# Altium PCB CSP - potentiometers_c.PcbDoc
Units mil, origin at the board's own origin, x right, y up, seen from the top; angles counter-clockwise.
Board outline 1390 x 2400 mil, 2 copper layers (Top Layer, Bottom Layer); 38 components, 21 nets, 80 pads, 0 vias.
Unrouted connection lines stored in the file: 11.
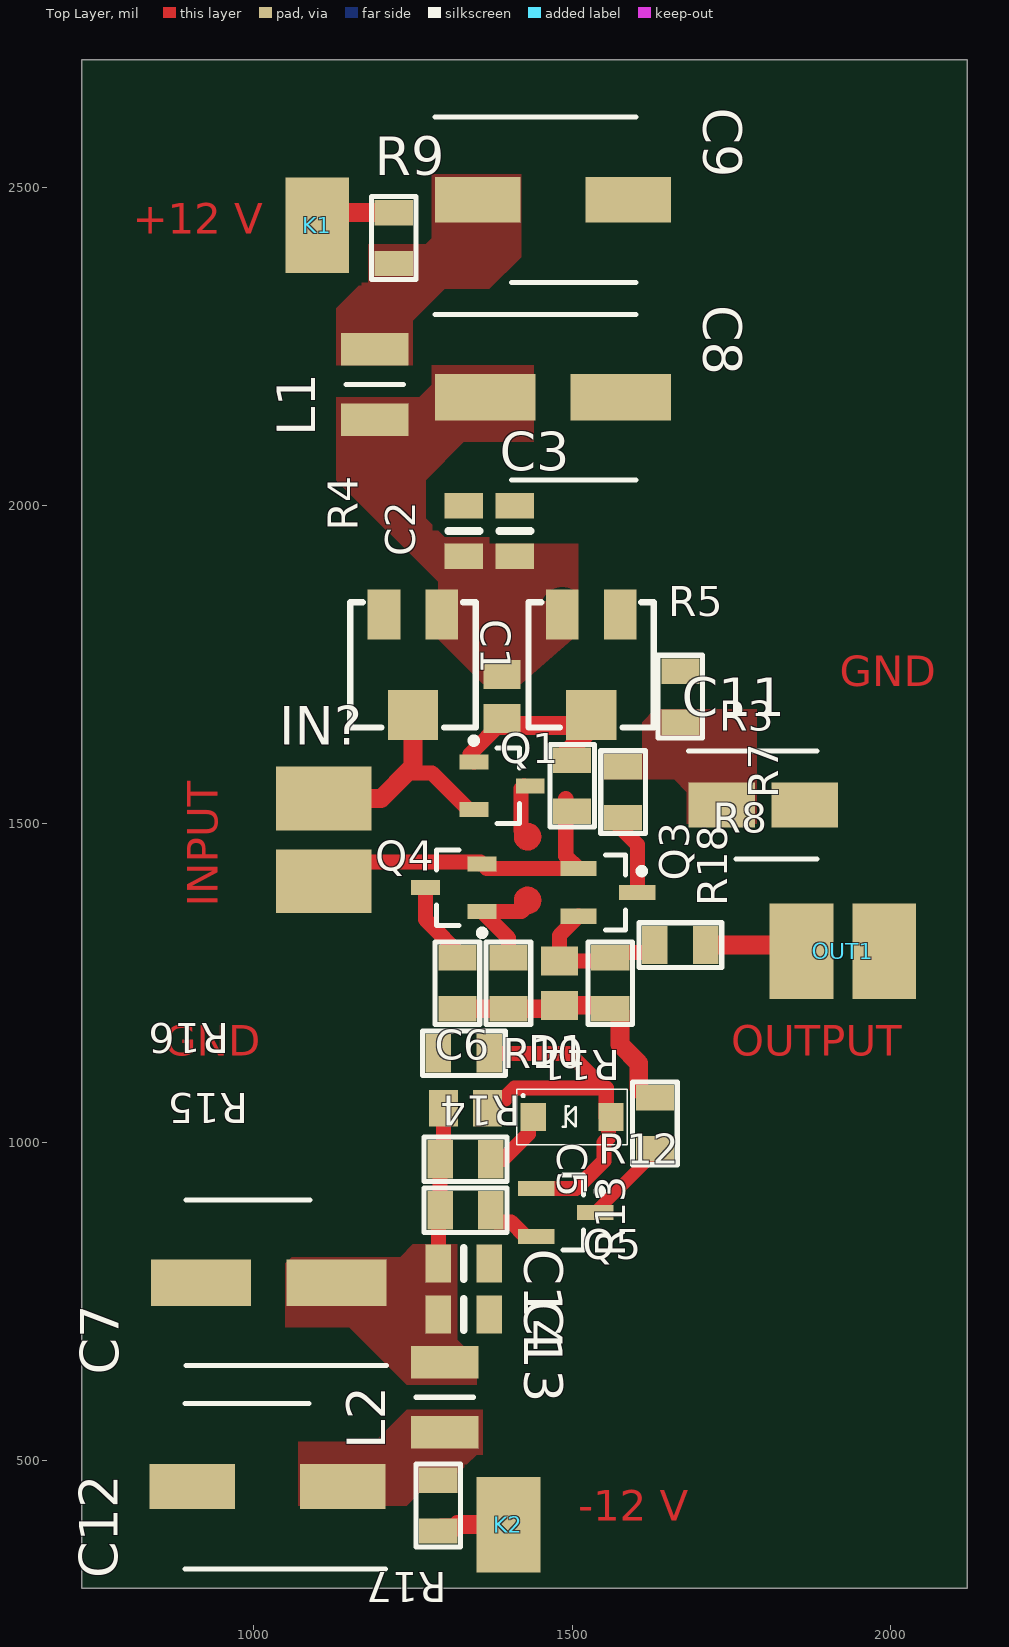
[diagram p0: Top Layer view]
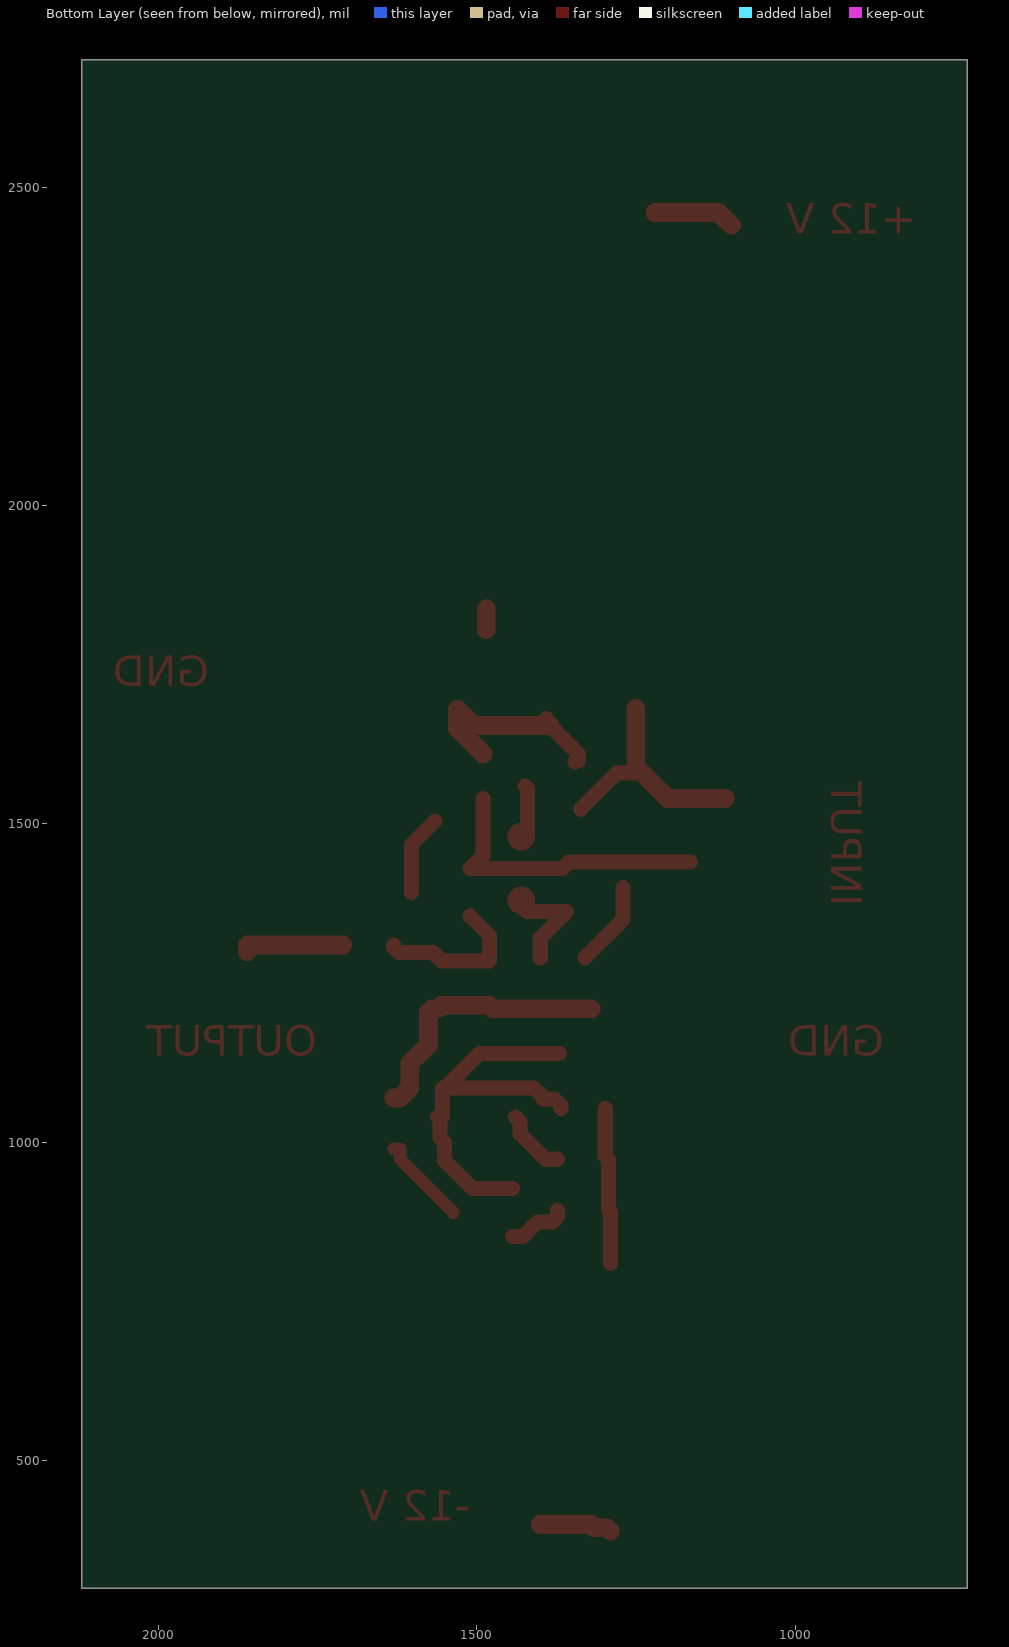
[diagram p1: Bottom Layer view, seen from below]
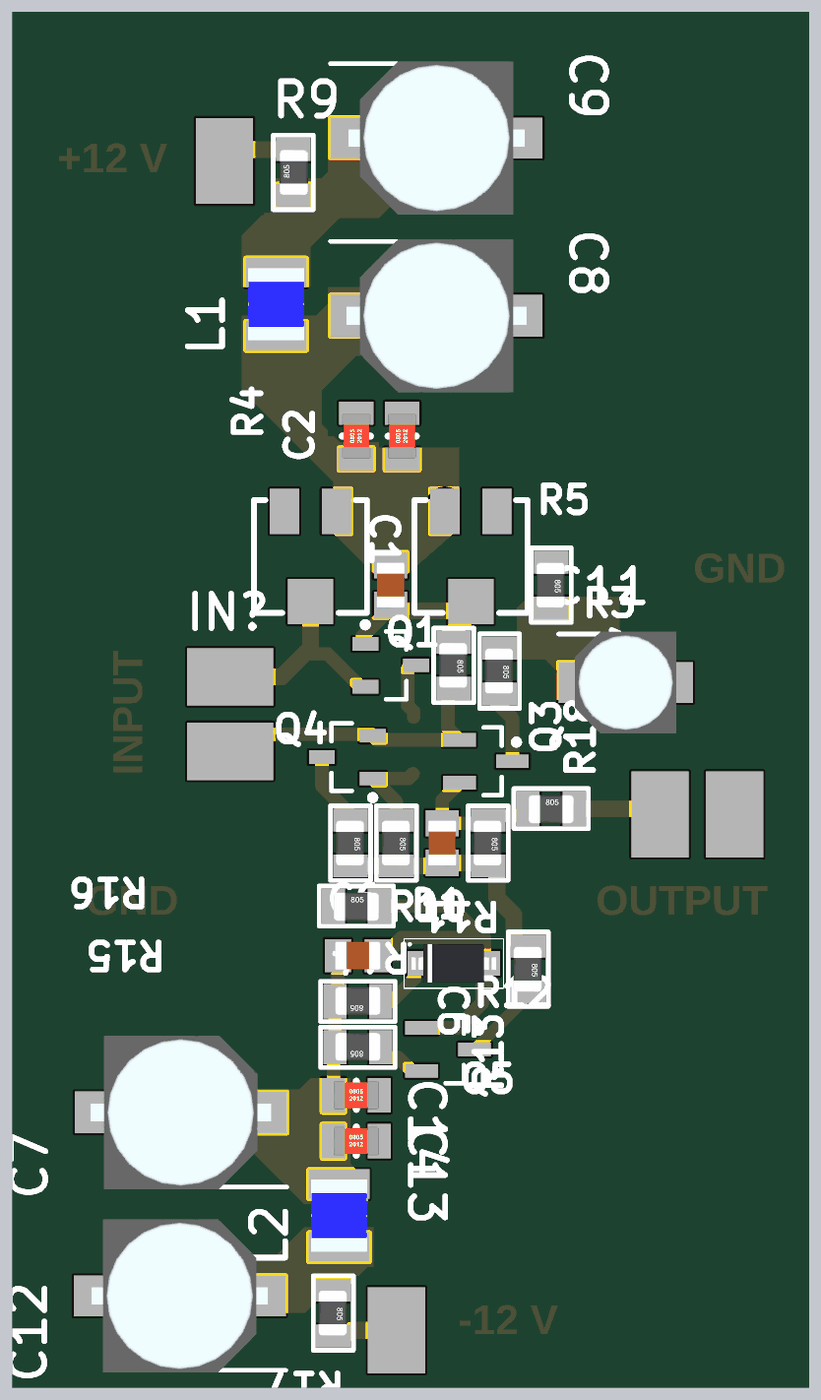
[diagram p2: 3D render of the assembled board from above, using the file's embedded part models]

## Layer stack, top to bottom
Top Solder: solder mask 0.4, Solder Resist, Dk 3.5
Top Layer: signal copper 1.4
Dielectric 1: dielectric 12.6, FR-4, Dk 4.8
Bottom Layer: signal copper 1.4
Bottom Solder: solder mask 0.4, Solder Resist, Dk 3.5

## Board outline
730,300 2120,300 2120,2700 730,2700

## Design rules (kind name [scope] priority, off if disabled: settings)
Clearance [All] p1: gap=10 ignorepadtopadclearanceinfootprint=FALSE except(0: Arc-Hole Track-Hole SMDPad-Hole THPad-Hole Via-Hole Fill-Hole Poly-Text Poly-Hole Region-Hole Text-Hole; 11.81: Arc-Arc Arc-Track Arc-SMDPad Arc-THPad Arc-Via Arc-Fill Arc-Poly Arc-Region Arc-Text Track-Track Track-SMDPad Track-THPad Track-Via Track-Fill Track-Region Track-Text; 19.68: Track-Poly SMDPad-Poly)
PlaneConnect [All] p1: planeconnectstyle=Direct reliefexpansion=20 reliefentries=4 reliefconductorwidth=10 reliefairgap=10
PolygonConnect [All] p1: connectstyle=Direct reliefconductorwidth=10 reliefentries=4 polygonreliefangle="90 Angle" airgapwidth=10
RoutingVias [All] p1: holewidth=28 width=50 viastyle="Through Hole" minholewidth=28 minwidth=50 maxholewidth=28 maxwidth=50
SolderMaskExpansion [All] p1: expansion=4 istentingtop=FALSE
Width [All] p1: maxlimit=200 minlimit=10 preferedwidth=23.62 bottomlayer_maxwidth=10 bottomlayer_prefwidth=10 minimp=50.000000 maximp=50.000000 favimp=50.000000
29 further rules are at their usual default settings.

## Components (designator, comment, footprint, x,y, rotation, side; value= is the part's Value field where it differs from the comment)
C1 "Cap" *CAPC2012X94N 1390,1700 r90 top value=1uF
C2 "Cap" SMD-0805C 1330,1960 r0 top value=0.1uF
C3 "Cap" SMD-0805C 1410,1960 r0 top value=0.01uF
C5 "Cap" *CAPC2012X94N 1480,1250 r90 top value=1uF
C6 "Cap" *CAPC2012X94N 1332.6,1053.62 r0 top value=0.01uF
C7 "#NAME?" CAPAE660X550N 1023.7,780 r180 top value=22uF
C8 "#NAME?" CAPAE660X550N 1470,2170 r0 top value=22uF
C9 "#NAME?" CAPAE660X800N 1470,2480 r0 top value=100uF
C11 "#NAME?" CAPAE430X550N 1800,1530 r0 top value=1uF
C12 "#NAME?" CAPAE660X800N 1021.89,460 r180 top value=100uF
C13 "Cap" SMD-0805C 1330,730 r270 top value=0.1uF
C14 "Cap" SMD-0805C 1330,810 r270 top value=0.01uF
D1 "Diode" SODFL350X110-2N 1500,1040 r0 top
IN? "INPUT" IN/OUT 1110,1540 r0 top
K1 "+12V" PAD 1100,2440 r90 top
K2 "-12V" PAD 1400,400 r90 top
L1 "390uH" INDC3225X270N 1190,2190 r90 top
L2 "390uH" INDC3225X270N 1300,600 r90 top
OUT1 "OUTPUT" IN/OUT 1860,1300 r90 top
Q1 "2N3906 PNP" SOT-23B_N 1390,1560 r0 top
Q3 "2N3904 NPN" SOT23_M 1556.26,1392.6 r0 top
Q4 "2N3906 PNP" SOT-23B_N 1314.29,1400 r180 top
Q5 "2N3904 NPN" SOT23_M 1490,890 r0 top
R3 "Res1" SMD-0805-RES 1670,1700 r180 top value=33
R4 "RPot SM" POT4MM-2 1250,1750 r270 top
R5 "RPot SM" POT4MM-2 1530,1750 r270 top
R7 "Res1" SMD-0805-RES 1500,1560 r180 top value=3K
R8 "Res1" SMD-0805-RES 1580,1550 r180 top value=33
R9 "Res1" SMD-0805-RES 1220,2420 r0 top value=100
R10 "Res1" SMD-0805-RES 1400,1250 r180 top value=15k
R11 "Res1" SMD-0805-RES 1560,1250 r180 top value=500
R12 "Res1" SMD-0805-RES 1320,1250 r180 top value=33
R13 "Res1" SMD-0805-RES 1630,1030 r180 top value=33
R14 "Res1" SMD-0805-RES 1330,1140 r270 top value=10K
R15 "Res1" SMD-0805-RES 1332.6,893.62 r90 top value=100
R16 "Res1" SMD-0805-RES 1332.6,973.62 r90 top value=1.4k
R17 "100" SMD-0805-RES 1290,430 r180 top
R18 "Res1" SMD-0805-RES 1670,1310 r270 top value=51

## Footprints (in the part's own frame and the unit in brackets; to place one, negate y for a bottom-side part, rotate by r counter-clockwise, add the part's x,y. Pads: shape width x height; smd on the part's side, far side on the other; paste and mask are expansions set on the pad)
*CAPC2012X94N [mm]
  rect 1.16x1.47 smd: 1(-0.88,0) 2(0.88,0)
  body extent -1,-0.62 1.01,0.63, height 0.94
CAPAE430X550N [mm]
  rect 2.65x1.8 smd: 1(-1.65,0) 2(1.65,0)
  silkscreen extent -2.98,-2.15 2.15,2.15, body extent -2.25,-2.25 2.25,2.25, height 5.5
CAPAE660X550N [mm]
  rect 4x1.85 smd: 1(-2.7,0) 2(2.7,0)
  silkscreen extent -4.7,-3.3 3.3,3.3, body extent -4,-3.4 4,3.4, height 5.5
CAPAE660X800N [mm]
  rect 3.4x1.8 smd: 1(-3,0) 2(3,0)
  silkscreen extent -4.7,-3.3 3.3,3.3, body extent -3.9,-3.4 3.9,3.4, height 8
IN/OUT [mil]
  rect 150x100 smd: 1(0,0) 2(0,-130)
INDC3225X270N [mm]
  rect 1.3x2.7 smd: 1(-1.4,0) 2(1.4,0)
  silkscreen extent 0,-1.15 0,1.15, body extent -1.6,-1.25 1.6,1.25, height 2.7
PAD [mil]
  rect 150x100 smd: 1(0,0)
POT4MM-2 [mm] "Square Trimming Potentiometer"
  rect 2x1.3 smd: CCW(-2,-1.15) CW(-2,1.15)
  rect 2x2 smd: W(2,0)
  silkscreen extent -2.5,-2.5 2.5,2.5
SMD-0805-RES [mil]
  rect 60x40 smd: 1(0,40) 2(0,-40)
  silkscreen extent -35,-65 35,65, body extent -24,-39 26,39, height 31
SMD-0805C [mil]
  rect 60x40 smd: 1(0,40) 2(0,-40)
  silkscreen extent -25,0 25,0, body extent -25,-39 25,39, height 35
SODFL350X110-2N [mm] "SODFL, 2-Leads, Body 1.70x3.50mm, IPC Medium Density"
  rect 1x1.1 smd: A(1.55,0) C(-1.55,0)
  silkscreen extent -2.2,-1.1 2.2,1.1, body extent -1.87,-0.85 1.88,0.85, height 1.2
SOT23_M [mm] "SOT23, 3-Leads, Body 2.9x1.3mm, Pitch 0.95mm, Lead Span 2.3mm - Reverse Pinning, IPC Low Density"
  rect 1.45x0.6 smd: 1(1.175,0) 2(-1.175,-0.95) 3(-1.175,0.95)
  silkscreen extent -0.1,-1.5 1.48,1.5, body extent -0.7,-1.5 0.7,1.5, height 1.1
SOT-23B_N [mm] "SOT23, 3-Leads, Body 2.9x1.3mm, Pitch 0.95mm, Lead Span 2.4mm, IPC Medium Density"
  rect 1.15x0.6 smd: 1(-1.125,0.95) 2(-1.125,-0.95) 3(1.125,0)
  silkscreen extent -1.25,-1.5 0.7,1.92, body extent -0.7,-1.5 0.7,1.5, height 1.14

## Part data
C1 C2 C3 C5 C6 C13 C14: "Capacitor", LatestRevisionDate=17-Jul-2002, LatestRevisionNote="Re-released for DXP Platform.", PackageDescription="Radial Cap, Thru-Hole; 2 Leads; 0.3 in Pin Spacing", PackageReference=RAD-0.3, Published=8-Jun-2000, Publisher="Altium Limited"
C7 C8: library part TYEH1V226F55MTR, "22uF 35V, Capacitor Polarised", Voltage=35V, Dimension=6.3x5.3mm, Part number=TYEH1V226F55MTR
C9 C12: library part EEEFK1E101P, "100uF 25V, cap polarised", Voltage=25V, Dimensions=8x6.2mm, Part number=EEEFK1E101P
C11: library part UWT1H010MCL1GB, "1uF 50V, Capacitor Polarised", Manufacturer_Name=Nichicon, Voltage=50V, Dimensions=4x5.4mm, Part number=UWT1H010MCL1GB
L1 L2: library part NLV10JT391, "390uH, Inductor", Package=1210, Resistance=36
Q1 Q4: library part PNP, "PNP Bipolar Transistor", LatestRevisionDate=29-May-2009, LatestRevisionNote="IPC-7351 Footprint Added.", PackageDescription="3-Pin SOT-23 Package 0.95 mm Pitch, 2.4 mm Lead Span", PackageReference=SOT-23B, PackageVersion=Aug-1999, Published=8-Jun-2000, Publisher="Altium Limited"
Q3 Q5: library part NPN, "NPN Bipolar Transistor", Code_JEDEC=TO-226-AA, LatestRevisionDate=17-Jul-2002, LatestRevisionNote="Re-released for DXP Platform.", PackageDescription="TO, Flat Index; 3 In-Line, Axial Leads; Body Dia. 4.8mm; Leads 0.55 x 0.51 mm (max)", PackageReference=TO-226-AA, Published=8-Jun-2000, Publisher="Altium Limited"
R3 R7 R8 R9 R10 R11 R12 R13 R14 R15 R16 R18: "Resistor", LatestRevisionDate=17-Jul-2002, LatestRevisionNote="Re-released for DXP Platform.", PackageDescription="Axial Device, Thru-Hole; 2 Leads; 0.3 in Pin Spacing", PackageReference=AXIAL-0.3, Published=8-Jun-2000, Publisher="Altium Limited"
R4 R5: "Square Trimming Potentiometer", ComponentLink1Description="Manufacturer Link", ComponentLink1URL=http://bourns.com/2/search.html, DatasheetVersion=Oct-2003, PackageDescription="Square Trimming Potentiometer", PackageReference=POT4MM-2, Published=17-Dec-2003, Publisher="Altium Limited"
R17: library part Res1, "Resistor", LatestRevisionDate=17-Jul-2002, LatestRevisionNote="Re-released for DXP Platform.", PackageDescription="Axial Device, Thru-Hole; 2 Leads; 0.3 in Pin Spacing", PackageReference=AXIAL-0.3, Published=8-Jun-2000, Publisher="Altium Limited"

## Nets (pads, with @x,y where several pads share a name; then routed paths per layer and width w, separated by ;. In a path a pad name is that pad's centre, name@x,y a point inside that pad or via, vN(x,y) a via of type N, cw(c..) or ccw(c..) an arc to the next point about the centre after c; other vN are vias at no path point)
GND: C2.1 C3.1 C7.2 C8.2 C9.2 C11.2 C12.2 C13.1 C14.1 R14.2
NetC1_1: C1.1 Q1.1 R5.W R7.2 | length 334.9
  Top Layer w23.62: Q1.1 1343.11,1600 1340,1600 1340,1610 1390,1660 C1.1
  Top Layer w29.53: C1.1@1384.88,1654.88 1504.88,1654.88 1530,1680 1530,1650 R7.2@1490,1610
NetC1_2: C1.2 C2.2 C3.2 C8.1 L1.1 R3.2 R4.CW R5.CCW | length 32.2
  Top Layer w29.53: R5.CCW@1484.72,1805.28 R5.CCW@1484.72,1837.48
NetC5_1: C5.1 R10.1 R11.1 R12.1 R13.2 | length 417.6
  Top Layer w23.62: C5.1@1474.65,1210 C5.1
  Top Layer w29.53: R12.1 R10.1 C5.1@1474.65,1210 ; C5.1 R11.1@1554.65,1215.35 ; R11.1 1570,1210 1575.24,1204.76 1575.24,1153.82 1604.76,1124.29 1604.76,1085.24 1620,1070 R13.2
NetC5_2: C5.2 Q3.2 R11.2 R18.2 | length 245.6
  Top Layer w23.62: Q3.2 1480,1325.2 C5.2 1554.65,1284.65 1568.19,1298.19 1621.81,1298.19 1630,1306.38 R18.2
NetC6_1: C6.1 C7.1 C13.2 C14.2 L2.2 R15.1 R16.1 | length 246.9
  Top Layer w23.62: C14.2 1290,891.02 R15.1 R16.1 1297.95,978.98 C6.1
NetC6_2: C6.2 D1.A Q5.3 R14.1 | length 661.7
  Top Layer w23.62: C6.2 1367.24,1057.48 1378.27,1068.5 1395.67,1068.5 1395.67,1071.44 1409.51,1085.28 1553.62,1085.28 1553.62,1040 D1.A 1557.4,1036.38 1557.4,1007.4 1550,1000 1550,971.24 1506.16,927.4 Q5.3 ; R14.1 1495.18,1140 1553.62,1081.56
NetC9_1: C9.1 L1.2 R9.2
NetC11_1: C11.1 R3.1 R8.2
NetC12_1: C12.1 L2.1 R17.2
NetD1_C: D1.C R16.2 | length 105
  Top Layer w23.62: R16.2 1391.57,973.62 1431.57,1013.62 1431.57,1032.6 D1.C
NetIN?_1: IN?.1 Q1.2 R4.W | length 377.8
  Top Layer w23.62: 1245,1585 1250,1580 1268.31,1580 ; 1260,1580 1280,1580 1335.71,1524.29 Q1.2@1335.71,1522.6
  Top Layer w29.53: IN?.1 1200,1540 1245,1585 1250,1590 R4.W R4.W@1250,1681.26
NetIN?_2: IN?.2 Q3.3 Q4.2 R7.1 | length 468.6
  Top Layer w23.62: IN?.2@1163.78,1440 1355.98,1440 Q4.2 1365.98,1430 Q3.3 1490,1450 1490,1540
NetK1_1: K1.1 R9.1 | length 128.3
  Top Layer w29.53: K1.1 1120,2460 R9.1
NetK2_1: K2.1 R17.1 | length 114.1
  Top Layer w29.53: R17.1 1295.24,395.24 1315.71,395.24 1320.47,400 K2.1
NetOUT1_1: OUT1.1 R18.1 | length 160
  Top Layer w29.53: R18.1 1860,1310 OUT1.1
NetQ1_3: Q1.3 Q4.1 R10.2 | length 408.1
  Top Layer w19.68: 1441.81,1380 ccw(c1430,1380) 1441.81,1380 ; 1441.81,1480 ccw(c1430,1480) 1441.81,1480
  Top Layer w23.62: R10.2 1400,1321.18 Q4.1 1420.73,1362.6 1429.08,1370.95 ; Q1.3@1424.29,1560 1420,1555.71 1420,1490 1421.65,1488.35 1430,1480 1430,1470
NetQ3_1: Q3.1 R8.1 | length 127.9
  Top Layer w23.62: R8.1@1565,1505 1602.52,1467.48 Q3.1
NetQ4_3: Q4.3 R12.2 | length 134.9
  Top Layer w23.62: Q4.3 1270,1350 R12.2@1330,1290
NetQ5_1: Q5.1 R13.1 | length 144.7
  Top Layer w19.68: Q5.1 1620,973.74 1620,990 R13.1
NetQ5_2: Q5.2 R15.2 | length 94
  Top Layer w23.62: R15.2 1372.6,883.62 1380.79,875.43 1404.17,875.43 1427.01,852.6 Q5.2
pads on no net: OUT1.2 R4.CCW R5.CW

## Polygon pours and split planes (outlines as drawn)
NetC9_1 on Top Layer "NETC9_1_L01_P039" (solid, pour order 39): 1130,2220 1130,2310 1170,2350 1180,2350 1180,2410 1270,2410 1280,2420 1280,2520 1420,2520 1420,2390 1370,2340 1300,2340 1250,2290 1250,2220
NetC1_2 on Top Layer "NETC1_2_L01_P038" (solid, pour order 38): 1440,2220 1280,2220 1280,2190 1260,2170 1130,2170 1130,2040 1290,1880 1370,1880 1370,1950 1300,1950 1270,1980 1270,2040 1330,2100 1440,2100
NetC12_1 on Top Layer "NETC12_1_L01_P036" (solid, pour order 36): 1070,430 1240,430 1260,450 1320,450 1320,480 1350,510 1360,510 1360,580 1240,580 1190,530 1070,530
NetC6_1 on Top Layer "NETC6_1_L01_P035" (solid, pour order 35): 1050,810 1060,820 1230,820 1250,840 1320,840 1320,690 1330,680 1350,680 1350,620 1240,620 1150,710 1050,710
NetC1_2 on Top Layer "NETC1_2_L01_P023" (solid, pour order 23): 1290,1790 1290,1940 1510,1940 1510,1790
NetC11_1 on Top Layer "NETC11_1_L01_P025" (solid, pour order 25): 1550,1610 1610,1610 1610,1660 1630,1680 1790,1680 1790,1500 1680,1500 1680,1550 1660,1570 1550,1570
NetC1_2 on Top Layer "NETC1_2_L01_P013" (solid, pour order 13): 1290,1850 1290,1790 1360,1720 1420,1720 1500,1790 1500,1850
GND on Top Layer "GND_L01_P019" (solid, pour order 19): 3540,2840 3540,3420 3840,3420 3880,3460 4010,3460 4050,3500 4130,3500 4150,3480 4150,3390 4180,3360 4300,3360 4310,3350 4310,3280 4330,3260 4390,3260 4410,3240 4410,2920 4570,2920 4570,2720 4290,2720 4290,2660 4270,2640 4040,2640 4040,2500 4060,2480 4100,2480 4100,2350 3810,2350 3790,2370 3550,2370 3550,2480 3590,2520 3590,2610 3570,2630 3570,2840 3260,2840 3260,2240 4800,2240 4800,3670 3260,3670 3260,2840
no net on Top Layer "NONET_L01_P018" (solid, pour order 18): 720,1370
no net on Top Layer "NONET_L01_P017" (solid, pour order 17): 720,1385
no net on Top Layer "NONET_L01_P008" (solid, pour order 8): 1020,3990
no net on Top Layer "NONET_L01_P003" (solid, pour order 3): 2200,3380
no net on Top Layer "NONET_L01_P000" (solid, pour order 0): 1860,3700

## Other copper
Top Layer:
  text "+12 V" at 810,2410 h82.68
  text "GND" at 1920,1700 h82.68
  text "INPUT" at 960,1370 h82.68 r90
  text "GND" at 860,1120 h82.68
  text "OUTPUT" at 1750,1120 h82.68
  text "-12 V" at 1510,390 h82.68

## Silkscreen, mask and mechanical layers (free items; w line width, h text height)
Mechanical 1:
  the board outline again, w11.81